# Altium PCB power_inductor_tester.PcbDoc
Units mm, origin at the board's own origin, x right, y up, seen from the top; angles counter-clockwise.
Board outline 95.6 x 69.5 mm, 2 copper layers (Top Layer, Bottom Layer); 37 components, 17 nets, 101 pads, 156 vias.
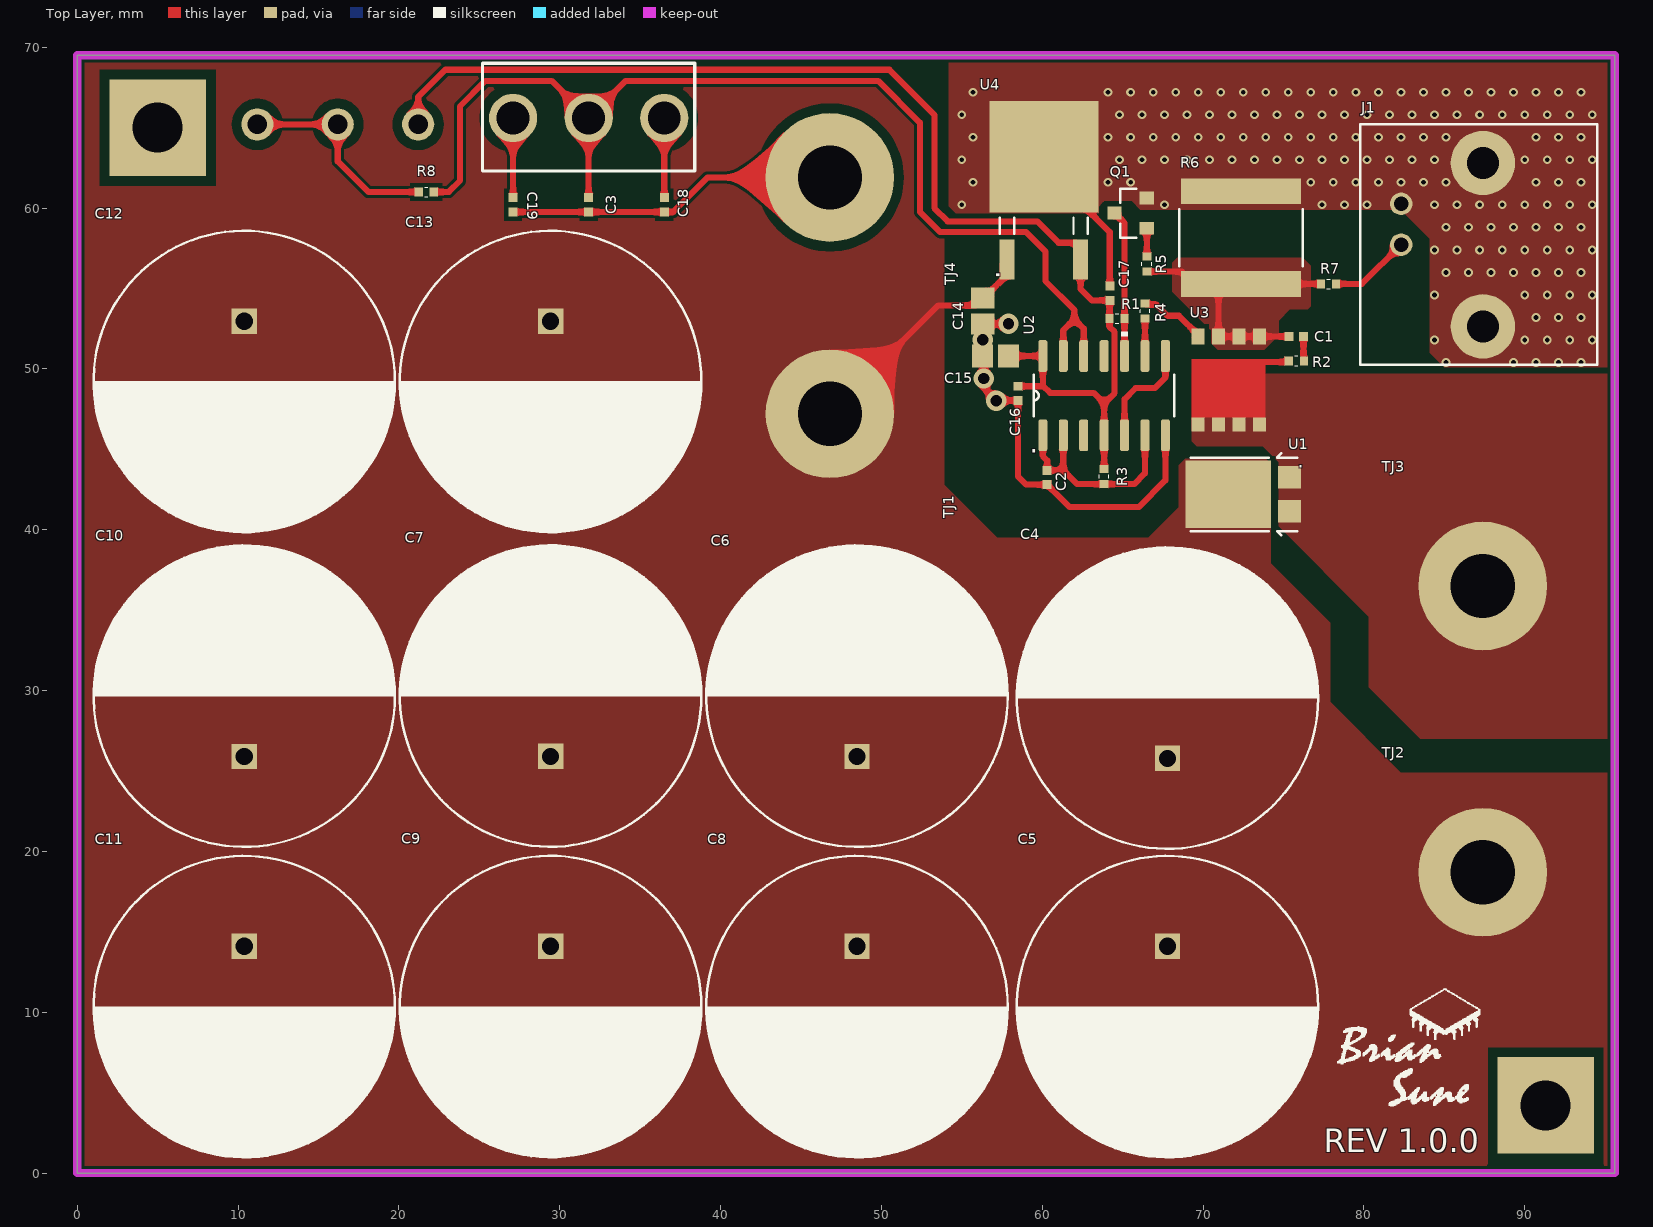
[diagram p0: Top Layer view]
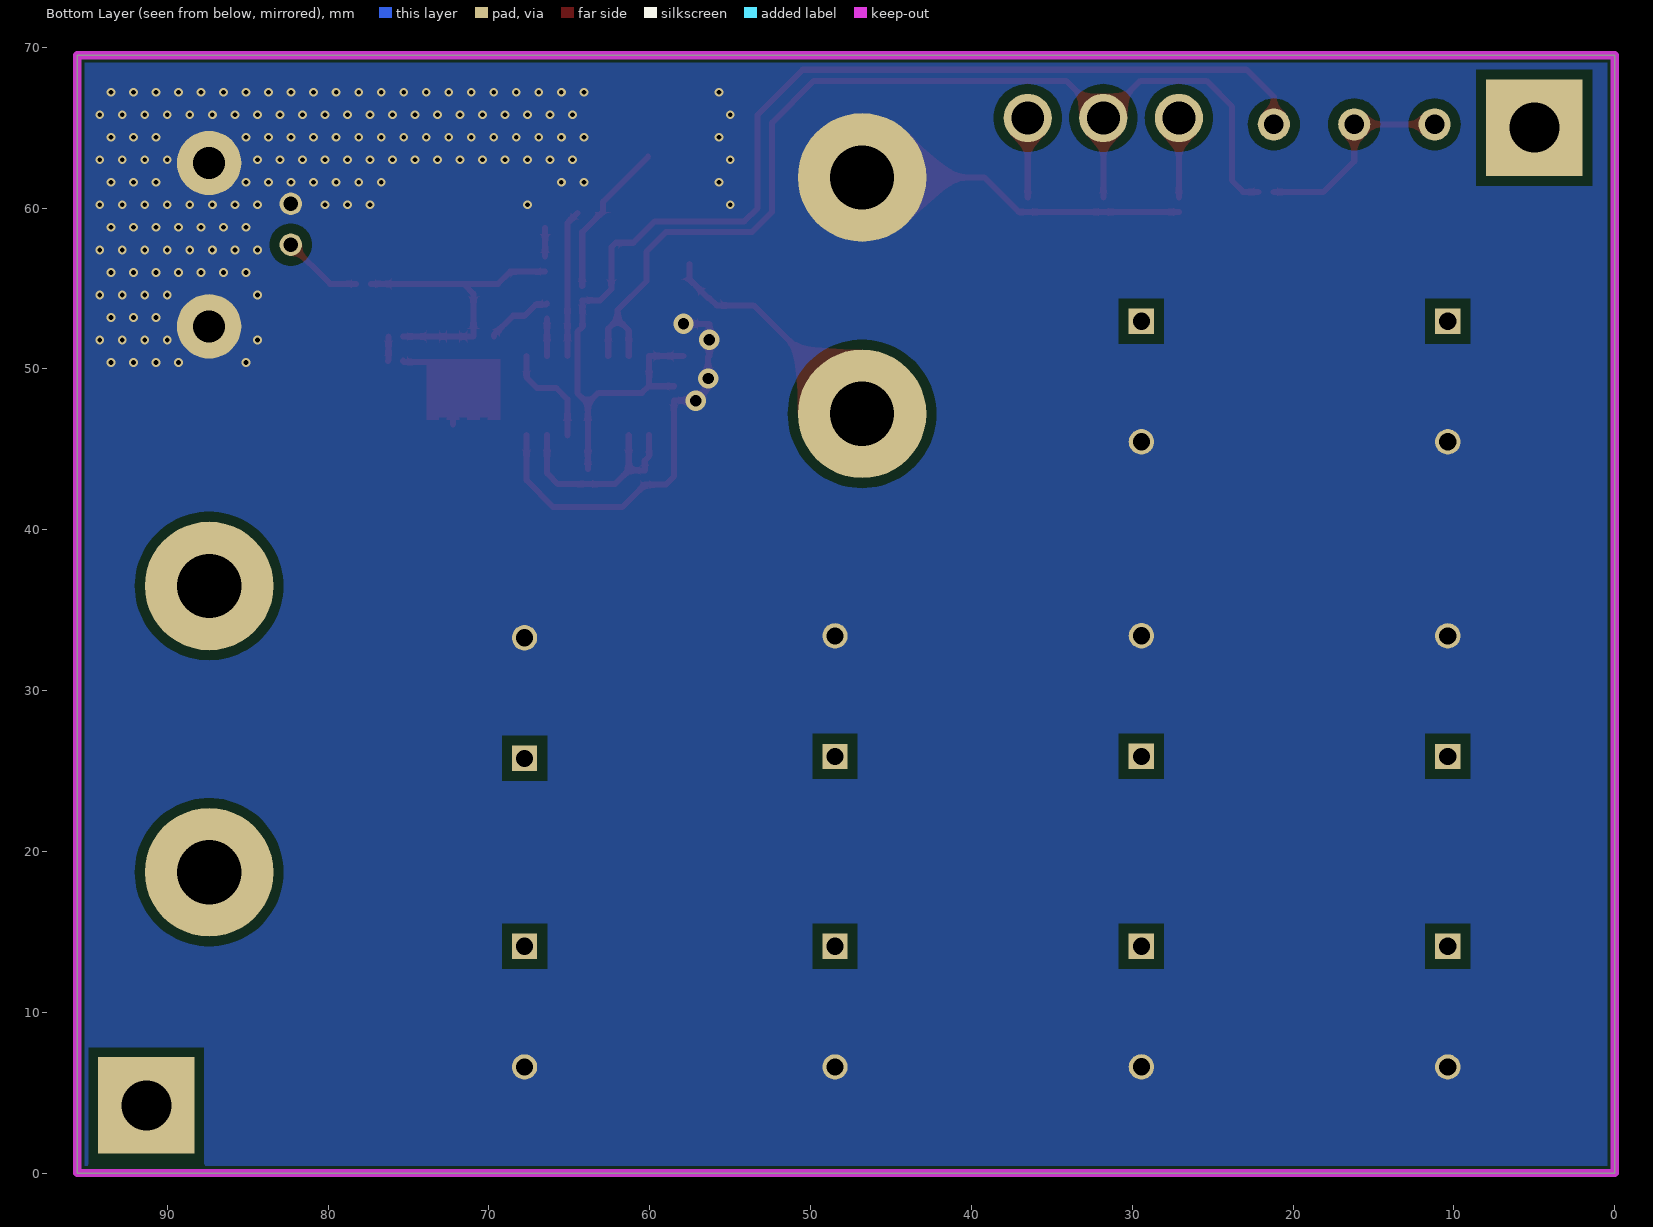
[diagram p1: Bottom Layer view, seen from below]
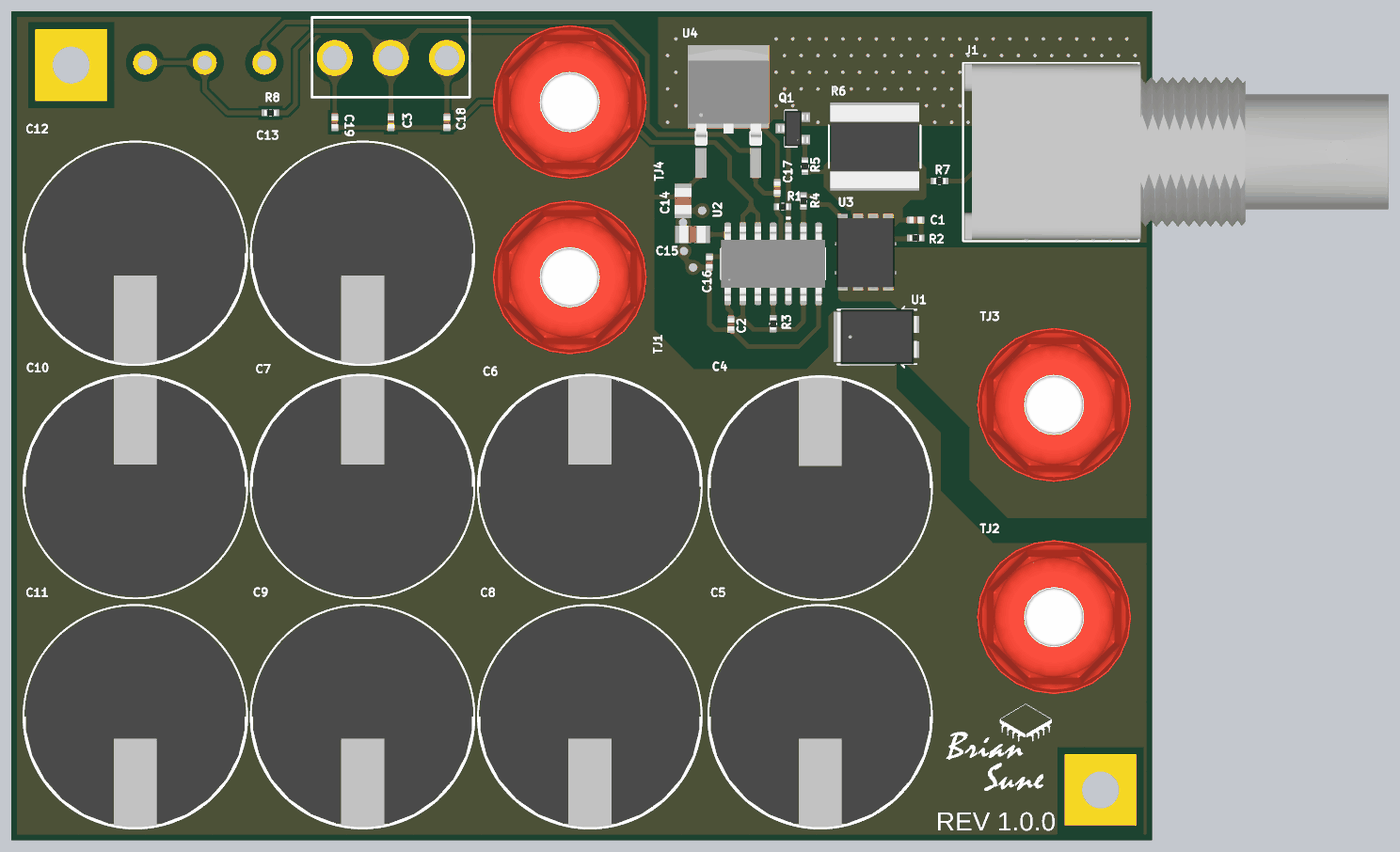
[diagram p2: 3D render of the assembled board from above, using the file's embedded part models]

## Layer stack, top to bottom
Top Solder: solder mask 0.0102, Solder Resist, Dk 3.5
Top Layer: signal copper 0.0356
Dielectric 1: dielectric 0.32, FR-4, Dk 4.8
Bottom Layer: signal copper 0.0356
Bottom Solder: solder mask 0.0102, Solder Resist, Dk 3.5

## Board outline
0,0 95.6,0 95.6,69.5 0,69.5

## Design rules (kind name [scope] priority, off if disabled: settings)
Clearance [All] p1: gap=0.152 ignorepadtopadclearanceinfootprint=FALSE except(0: Arc-Hole Track-Hole SMDPad-Hole THPad-Hole Via-Hole Fill-Hole Poly-Hole Region-Hole Text-Hole; 0.203: Track-Poly SMDPad-Region THPad-Region Poly-Region; 0.305: SMDPad-Poly; 0.406: Poly-Poly; 0.61: THPad-Poly)
DiffPairsRouting [All] p1: maxlimit=0.254 minlimit=0.152 mostfreqgap=0.203 toplayer_minwidth=0.152 toplayer_maxwidth=0.381 toplayer_prefwidth=0.203 bottomlayer_minwidth=0.152 bottomlayer_maxwidth=0.381 bottomlayer_prefwidth=0.203 maxuncoupledlength=12.7
Height [All] p1: minheight=0 maxheight=40 prefheight=12.7
HoleSize [All] p1: absolutevalues=TRUE maxlimit=6 minlimit=0.025 maxpercent=80.000 minpercent=20.000
HoleToHoleClearance [All] p1: gap=0.076 allowstackedmicrovias=TRUE
MinimumSolderMaskSliver [All] p1: minsoldermaskwidth=0.025
PolygonConnect [All] p1: connectstyle=Direct reliefconductorwidth=0.305 reliefentries=4 polygonreliefangle="90 Angle" airgapwidth=0.203
RoutingVias [All] p1: holewidth=0.4 width=0.6 viastyle="Through Hole" minholewidth=0.3 minwidth=0.5 maxholewidth=2.8 maxwidth=3
SilkToSilkClearance [All] p1: silktosilkclearance=0.076
SilkToSolderMaskClearance [IsPad] p1: minsilkscreentomaskgap=0.025 clearancetoexposedcopper=TRUE
SolderMaskExpansion [All] p1: expansion=0.025
Width [All] p1: maxlimit=1.016 minlimit=0.152 preferedwidth=0.254
23 further rules are at their usual default settings.

## Components (designator, comment, footprint, x,y, rotation, side; value= is the part's Value field where it differs from the comment)
C1 "10uF" CAP_CC0402_YAG 75.8,52.012 r0 top
C2 "10uF" CAP_CC0402_YAG 60.31,43.246 r90 top
C3 "10uF" CAP_CC0402_YAG 31.8,60.2 r90 top
C4 "2200uF" CAP_2135_18X25_VIS 67.787,25.779 r90 top
C5 "2200uF" CAP_2135_18X25_VIS 67.787,14.095 r270 top
C6 "2200uF" CAP_2135_18X25_VIS 48.483,25.899 r90 top
C7 "2200uF" CAP_2135_18X25_VIS 29.433,25.906 r90 top
C8 "2200uF" CAP_2135_18X25_VIS 48.483,14.095 r270 top
C9 "2200uF" CAP_2135_18X25_VIS 29.433,14.102 r270 top
C10 "2200uF" CAP_2135_18X25_VIS 10.383,25.899 r90 top
C11 "2200uF" CAP_2135_18X25_VIS 10.383,14.095 r270 top
C12 "2200uF" CAP_2135_18X25_VIS 10.383,52.964 r270 top
C13 "2200uF" CAP_2135_18X25_VIS 29.433,52.964 r270 top
C14 "10uF" CAPC220145_145N_KEM 56.297,53.6 r90 top
C15 "10uF" CAPC220145_145N_KEM 57.1,50.798 r0 top
C16 "10uF" CAP_CC0402_YAG 58.5,48.474 r90 top
C17 "10uF" CAP_CC0402_YAG 64.2,54.7 r270 top
C18 "10uF" CAP_CC0402_YAG 36.5,60.2 r270 top
C19 "10uF" CAP_CC0402_YAG 27.1,60.2 r270 top
J1 "BNC JACK" conn2_1-1337543-0_TEC 82.32,57.72 r270 top
Q1 "MMSS8050-H-TP" TNPN_SOT-23_MCC 65.501,59.688 r90 top
R1 "10k" 0402_PAN 64.65,53.122 r180 top
R2 "220k" 0402_PAN 75.8,50.5 r0 top
R3 "220k" 0402_PAN 63.85,43.305 r90 top
R4 "220k" 0402_PAN 66.39,53.592 r90 top
R5 "100R" 0402_PAN 66.504,56.513 r90 top
R6 "R010" STA_CSSH2728_STP 72.359,58.164 r270 top
R7 "220k" 0402_PAN 77.8,55.281 r180 top
R8 "10k" 0402_PAN 21.7,61 r180 top
TJ1 "73098-0" 73098 46.8,47.2 r0 top
TJ2 "73098-0" 73098 87.4,18.7 r0 top
TJ3 "73098-0" 73098 87.4,36.5 r0 top
TJ4 "73098-0" 73098 46.8,61.9 r0 top
U1 "SB10100L" DIO_10100V_ONS 72.572,42.2 r90 top
U2 "NE556D" D14 63.85,48.334 r90 top
U3 "NMOS" SMT_009LCG-7_DIO 71.597,49.274 r270 top
U4 "MC78M12ABDTG" DPAK-3_ONS 60.1,63.2 r0 top

## Footprints (in the part's own frame and the unit in brackets; to place one, negate y for a bottom-side part, rotate by r counter-clockwise, add the part's x,y. Pads: shape width x height; smd on the part's side, far side on the other; paste and mask are expansions set on the pad)
0402_PAN [mil]
  rect 20x22 smd paste+0 mask+0: 1(-18.5,0) 2(18.5,0)
  silkscreen extent -4,-12 4,12, body extent -20,-10 20,10, height 14
73098 [mm]
  round 8 hole 4: T1(0,0)
  body extent -6.45,-6.45 6.45,6.45, height 29.89
CAP_2135_18X25_VIS [mil]
  rect 62x62 hole 42: 1(0,0)
  round 62 hole 42: 2(295.28,0)
  silkscreen extent -221,-369 685,370, body extent -216,-364 513,364, height 1064
CAP_CC0402_YAG [mil]
  rect 22x22 smd: 1(-17.5,0) 2(17.5,0)
  body extent -21,-11 21,11, height 22
CAPC220145_145N_KEM [mm]
  rect 1.306x1.45 smd paste+0 mask+0: 1(-0.803,0) 2(0.803,0)
  body extent -1.1,-0.72 1.1,0.72, height 1.45
conn2_1-1337543-0_TEC [mil]
  round 55 hole 35: 1(0,0) 2(-100,0)
  round 157.48 hole 79: 3(-200,200) 4(200,200)
  silkscreen extent -294,-100 294,480, body extent -289,-94 289,1303, height 695
D14 [mil]
  rrect50% 78x22 smd: 1(-97,150) 2(-97,100) 3(-97,50) 4(-97,0) 5(-97,-50) 6(-97,-100) 7(-97,-150) 8(97,-150) 9(97,-100) 10(97,-50) 11(97,0) 12(97,50) 13(97,100) 14(97,150)
  silkscreen extent -51,-172 156,172, body extent -122,-172 122,172, height 69
DIO_10100V_ONS [mil]
  rect 55x57 smd paste+0 mask+0: 1(41.34,-110.5) 2(-41.34,-110.5)
  rect 165x208.66 smd paste+0 mask+0: 3(0,39.37)
  silkscreen extent -100,-130 100,131, body extent -91,-131 91,131, height 49
DPAK-3_ONS [mil]
  rect 37x98 smd: 1(-90.16,-252.5) 3(90.16,-252.5)
  rect 267x273 smd: 2(0,0)
  silkscreen extent -108,-190 108,-150, body extent -133,-195 133,123, height 67
SMT_009LCG-7_DIO [mm]
  rect 1x0.8 smd: 1(-2.738,1.905) 2(-2.738,0.635) 3(-2.738,-0.635) 4(-2.738,-1.905)
  rect 0.85x0.8 smd: 5(2.738,-1.905) 6(2.738,-0.635) 7(2.738,0.635) 8(2.738,1.905)
  Top Layer region: 2.454,2.3 2.2,2.3 2.2,1.5 2.454,1.5
  Top Layer region: -1.338,-2.3 2.312,-2.3 2.312,2.3 -1.338,2.3
  Top Layer region: 2.2,0.235 2.454,0.235 2.454,1.035 2.2,1.035
  Top Layer region: 2.2,-1.035 2.454,-1.035 2.454,-0.235 2.2,-0.235
  Top Layer region: 2.2,-2.3 2.454,-2.3 2.454,-1.5 2.2,-1.5
  Top Layer region: -0.564,-1.166 -0.564,-1.166 -0.564,-1.166 -0.564,-1.166 -0.564,-1.166 -0.564,-1.166 -0.564,-1.166 -0.564,-1.166
  Top Layer region: -0.564,1.166 -0.564,1.166 -0.564,1.166 -0.564,1.166 -0.564,1.166 -0.564,1.166 -0.564,1.166 -0.564,1.166
  body extent -3.07,-2.57 3.08,2.58, height 1
STA_CSSH2728_STP [mil]
  rect 63x293 smd paste+0 mask+0: 1(-113.5,0) 2(113.5,0)
  silkscreen extent -70,-152 70,152, body extent -137,-146 137,146, height 49
TNPN_SOT-23_MCC [mil]
  rect 31x35 smd paste+0 mask+0: 1(-37,-39.5) 2(37,-39.5) 3(0,39.5)
  silkscreen extent -60,-13 60,25, body extent -59,-50 59,48, height 43

## Part data
C1 C2 C3 C16 C17 C18 C19: library part C0402C106M9PAC7411, "C0402C106M9PAC7411 / Multilayer Ceramic Capacitors MLCC - SMD/SMT 6.3V 10uF X5R 0402 20%", Mfr.=KEMET, ComponentLink1Description=mouser, ComponentLink1URL=https://www.mouser.hk/ProductDetail/KEMET/C0402C106M9PAC7411?qs=sGAEpiMZZMsh%252B1woXyUXj6I3P2ah4Lb%252BTMRMxmSxmgo%3D, Mfr. No=C0402C106M9PAC7411
C4 C5 C6 C7 C8 C9 C10 C11 C12 C13: library part MAL214650222E3, Mfr_Name=Vishay, Copyright="Copyright (C) 2022 Ultra Librarian. All rights reserved.", Manufacturer_Part_Number=MAL214650222E3, RefDes=RefDes, Type=DEV
C14 C15: library part C0805C106M9RACTU, "No Description Available", Mfr_Name=Kemet, Copyright="Copyright (C) 2022 Ultra Librarian. All rights reserved.", Manufacturer_Part_Number=C0805C106M9RACTU, RefDes=RefDes, Type=DEV
J1: library part 1-1337543-0, "1-1337543-0", Mfr_Name="TE Connectivity", ComponentLink1Description=mouser, ComponentLink1URL=https://www.mouser.hk/ProductDetail/TE-Connectivity/5226990-1?qs=6LdcgtkSXnZEvS11ySUywA%3D%3D, Manufacturer_Part_Number=1-1337543-0
Q1: "No Description Available", Mfr_Name=MCC, Copyright="Copyright (C) 2021 Ultra Librarian. All rights reserved.", Manufacturer_Part_Number=MMSS8050-H-TP, RefDes=RefDes, Type=DEV
R1 R8: library part RT0402FRE0710KL, "RT0402FRE0710KL / SMD 1/16W 10K ohm 1% 50ppm", Mfr.=YAGEO, ComponentLink1Description=mouser, ComponentLink1URL=https://www.mouser.hk/ProductDetail/YAGEO/RT0402FRE0710KL?qs=BXCcY9r%252B08Amup7nMFKW1g%3D%3D, Mfr. No=RT0402FRE0710KL
R2 R3 R4 R7: library part RT0402FRE07220KL, "RT0402FRE07220KL / Thin Film Resistors - SMD 220K ohm 1% 50ppm High Stability", Mfr.=YAGEO, ComponentLink1Description=mouser, ComponentLink1URL=https://www.mouser.hk/ProductDetail/YAGEO/RT0402FRE07220KL?qs=gY0y7AQI9SMoL0bNFq1hfg%3D%3D, Mfr. No=RT0402FRE07220KL
R5: library part RT0402FRE07100RL, "RT0402FRE07100RL / Thin Film Resistors - SMD 1/16W 100 ohm 1% 50ppm", Mfr.=YAGEO, ComponentLink1Description=mouser, ComponentLink1URL=https://www.mouser.hk/ProductDetail/YAGEO/RT0402FRE07100RL?qs=BXCcY9r%252B08AcvLZjF7vcwQ%3D%3D, Mfr. No=RT0402FRE07100RL
R6: library part CSSH2728FT10L0, "CSSH2728FT10L0", Manufacturer_Part_Number=CSSH2728FT30L0, Mfr_Name="Stackpole International"
TJ1 TJ2 TJ3 TJ4: Manufacturer="Pomona Electronics", Manufacturer Product Number=73098-0, Supplier=Description
U1: "SCHOTTKY DIODE TO-277 100V 10A", Mfr_Name=MDD, ComponentLink1Description=digikey, ComponentLink1URL=https://www.digikey.hk/en/products/detail/nextgen-components/SB10100L/15929898?s=N4IgTCBcDaIMoCECMAGVKAyACEBdAvkA, Manufacturer_Part_Number=SB10100L, RefDes=RefDes, Type=DEV
U2: "No Description Available", Mfr_Name="Texas Instruments", Copyright="Copyright (C) 2022 Ultra Librarian. All rights reserved.", Manufacturer_Part_Number=NE556D, RefDes=RefDes, Type=DEV
U3: library part DMT10H009LCG-7, "DMT10H009LCG-7", Mfr_Name="Diodes Inc", Copyright="Copyright (C) 2022 Ultra Librarian. All rights reserved.", Manufacturer_Part_Number=DMT10H009LCG-7, RefDes=RefDes, Type=DEV
U4: "No Description Available", Mfr_Name=onsemi, Copyright="Copyright (C) 2022 Ultra Librarian. All rights reserved.", Manufacturer_Part_Number=MC78M12ABDTG, RefDes=RefDes, Type=DEV

## Free pads (board coordinates)
  rect 6x6 hole 3.1 paste+0 mask+0.001: ""(5,65) ""(91.3,4.2)
  round 2 hole 1.205 paste+0 mask+0.001: ""(11.2,65.2) ""(16.2,65.2) ""(21.2,65.2)
  round 3 hole 2.05 paste+0 mask+0.001: ""(27.1,65.6) ""(31.8,65.6) ""(36.5,65.6)

## Via types
v1: diameter 0.55, hole 0.3, Top Layer to Bottom Layer, tented both sides, 152 vias
v2: diameter 1.27, hole 0.711, Top Layer to Bottom Layer, tented both sides, 4 vias

## Nets (pads, with @x,y where several pads share a name; then routed paths per layer and width w, separated by ;. In a path a pad name is that pad's centre, name@x,y a point inside that pad or via, vN(x,y) a via of type N, cw(c..) or ccw(c..) an arc to the next point about the centre after c; other vN are vias at no path point)
CP_S0: C18.1 pad.@36.5,65.6 | length 5
  Top Layer w0.381: C18.1 pad.@36.5,65.6
CP_S1: C19.1 pad.@27.1,65.6 | length 5
  Top Layer w0.381: C19.1 pad.@27.1,65.6
GND: C2.1 C3.1 C4.2 C5.2 C6.2 C7.2 C8.2 C9.2 C10.2 C11.2 C12.2 C13.2 C14.1 C15.1 C16.1 C17.1 C18.2 C19.2 J1.2 J1.3 J1.4 Q1.2 R6.1 TJ4.T1 U2.7 U4.2 | length 56.6
  Top Layer w0.381: C19.2 C3.1 C18.2 37.055,59.755 39.2,61.9 TJ4.T1 ; v2(57.903,52.797) C14.1 v2(56.297,51.798) C15.1 56.369,50.726 v2(56.369,49.4) 56.369,48.8 v2(57.14,48.029) C16.1 58.5,43.3 58.999,42.801 C2.1 61.711,41.4 66,41.4 67.66,43.06 U2.7 ; U4.2 62.9,60.4 62.9,59.8 64.2,58.5 C17.1
  other v1: 85.1,50.4 89.3,50.4 90.7,50.4 92.1,50.4 93.5,50.4 84.4,51.8 90,51.8 91.4,51.8 92.8,51.8 94.2,51.8 90.7,53.2 92.1,53.2 93.5,53.2 84.4,54.6 90,54.6 91.4,54.6 92.8,54.6 94.2,54.6 85.1,56 86.5,56 87.9,56 89.3,56 90.7,56 92.1,56 93.5,56 84.4,57.4 85.8,57.4 87.2,57.4 88.6,57.4 90,57.4 91.4,57.4 92.8,57.4 94.2,57.4 85.1,58.8 86.5,58.8 87.9,58.8 89.3,58.8 90.7,58.8 92.1,58.8 93.5,58.8 55,60.2 67.6,60.2 77.4,60.2 78.8,60.2 80.2,60.2 84.4,60.2 85.8,60.2 87.2,60.2 88.6,60.2 90,60.2 91.4,60.2 92.8,60.2 94.2,60.2 55.7,61.6 64.1,61.6 65.5,61.6 76.7,61.6 78.1,61.6 79.5,61.6 80.9,61.6 82.3,61.6 83.7,61.6 85.1,61.6 90.7,61.6 92.1,61.6 93.5,61.6 55,63 64.8,63 66.2,63 67.6,63 69,63 70.4,63 71.8,63 73.2,63 74.6,63 76,63 77.4,63 78.8,63 80.2,63 81.6,63 83,63 84.4,63 90,63 91.4,63 92.8,63 94.2,63 55.7,64.4 64.1,64.4 65.5,64.4 66.9,64.4 68.3,64.4 69.7,64.4 71.1,64.4 72.5,64.4 73.9,64.4 75.3,64.4 76.7,64.4 78.1,64.4 79.5,64.4 80.9,64.4 82.3,64.4 83.7,64.4 85.1,64.4 90.7,64.4 92.1,64.4 93.5,64.4 55,65.8 64.8,65.8 66.2,65.8 67.6,65.8 69,65.8 70.4,65.8 71.8,65.8 73.2,65.8 74.6,65.8 76,65.8 77.4,65.8 78.8,65.8 80.2,65.8 81.6,65.8 83,65.8 84.4,65.8 85.8,65.8 87.2,65.8 88.6,65.8 90,65.8 91.4,65.8 92.8,65.8 94.2,65.8 55.7,67.2 64.1,67.2 65.5,67.2 66.9,67.2 68.3,67.2 69.7,67.2 71.1,67.2 72.5,67.2 73.9,67.2 75.3,67.2 76.7,67.2 78.1,67.2 79.5,67.2 80.9,67.2 82.3,67.2 83.7,67.2 85.1,67.2 86.5,67.2 87.9,67.2 89.3,67.2 90.7,67.2 92.1,67.2 93.5,67.2
LDO_VOUT: C15.2 C16.2 C17.2 pad.@21.2,65.2 R1.2 R3.2 U2.4 U2.14 U4.3 | length 77
  Top Layer w0.381: pad.@21.2,65.2 21.2,66.91 22.89,68.6 50.494,68.6 53.3,65.794 53.3,60 54.129,59.171 59.69,59.171 61.021,57.841 62.111,57.841 62.39,57.561 U4.3 62.39,54.96 63.094,54.255 C17.2 64.19,54.246 64.19,53.132 R1.2 64.18,52.62 64.498,52.302 64.498,48.498 63.85,47.85 ; C15.2 U2.14 60.04,48.96 ; C16.2 59.998,48.918 60.04,48.96 ; R3.2 U2.4 63.85,47.85 ; 60.04,48.96 60.5,48.5 63.2,48.5 63.85,47.85
NetC1_1: C1.1 R5.1 R6.2 R7.2 U3.1 U3.2 U3.3 | length 19.1
  Top Layer w0.381: R5.1 68.676,56.043 69.438,55.281 R6.2@71.572,55.281 ; C1.1 U3.1 U3.2 U3.3 70.962,54.672 R6.2@71.572,55.281 ; R7.2 R6.2 R6.2@71.572,55.281
NetC1_2: C1.2 R2.2 | length 1.5
  Top Layer w0.381: C1.2 76.245,50.525 R2.2
NetC2_2: C2.2 R3.1 U2.1 U2.2 U2.6 | length 13.6
  Top Layer w0.381: U2.1 60.04,44.57 60.31,44.3 C2.2 61.31,43.69 ; U2.2 61.31,43.69 ; U2.6 66.39,43.5 65.725,42.835 R3.1 62.165,42.835 61.31,43.69
NetC4_1: C4.1 C5.1 C6.1 C7.1 C8.1 C9.1 C10.1 C11.1 C12.1 C13.1 C14.2 TJ1.T1 TJ2.T1 U1.3 U4.1 | length 15.1
  Top Layer w0.381: TJ1.T1 53.54,53.94 55.835,53.94 C14.2 56.369,54.403 57.531,55.564 U4.1@57.531,56.507
NetJ1_1: J1.1 R7.1 | length 5.1
  Top Layer w0.381: R7.1 79.881,55.281 J1.1
NetQ1_1: Q1.1 R5.2 | length 1.8
  Top Layer w0.381: R5.2 Q1.1
NetQ1_3: Q1.3 R1.1 U2.10 | length 9.1
  Top Layer w0.381: Q1.3 65.12,59.066 R1.1 U2.10
NetR2_1: R2.1 TJ3.T1 U1.1 U1.2 U3.5 U3.6 U3.7 U3.8 | length 6.8
  Top Layer w0.381: U3.7 72.232,47.84 71.572,48.5 73.493,50.421 75.267,50.421 75.33,50.485 R2.1
NetR4_1: R4.1 U2.9 | length 2.3
  Top Layer w0.381: U2.9 R4.1
NetR4_2: R4.2 U3.4 | length 4.2
  Top Layer w0.381: R4.2 66.453,53.998 67.089,53.998 67.787,53.3 68.504,53.3 69.692,52.112 U3.4
NetU2_5: U2.5 U2.8 | length 6.7
  Top Layer w0.381: U2.5 65.12,48.12 65.8,48.8 67,48.8 67.66,49.46 U2.8
RC_CAP: C3.2 pad.@31.8,65.6 R8.1 U2.12 U2.13 | length 68.1
  Top Layer w0.381: R8.1 23.1,61 23.8,61.7 23.8,66.318 25.382,67.9 29.5,67.9 pad.@31.8,65.6 ; C3.2 pad.@31.8,65.6 ; U2.13 61.31,52.393 62,53.083 ; U2.12 62.58,52.503 62,53.083 ; pad.@31.8,65.6 34.1,67.9 49.8,67.9 52.4,65.3 52.4,59.759 53.659,58.5 59,58.5 60.2,57.3 60.2,55.463 62,53.663 62,53.083
RC_RES: pad.@11.2,65.2 pad.@16.2,65.2 R8.2 | length 13.1
  Top Layer w0.381: pad.@11.2,65.2 16.2,65.2 16.2,62.9 18.1,61 R8.2
pads on no net: U2.3 U2.11

## Polygon pours and split planes (outlines as drawn)
NetC4_1 on Top Layer "NETC4_1_L01_P002" (solid, remove dead copper, pour order 2): 95.6,0 95.6,24.9 82.3,24.9 77.9,29.3 77.9,34.203 74.203,37.9 74.203,44.097 73.9,44.4 68.903,44.4 68.504,44 68.504,41.404 66.6,39.5 57.201,39.5 53.9,42.801 53.9,69.5 0,69.5 0,0
GND on Top Layer "GND_L01_P008" (solid, remove dead copper, pour order 8): 82.3,59.9 84.1,58.1 84.1,51 85,50.1 95.6,50.1 95.6,69.5 54.2,69.5 54.2,60.1 54.612,59.688 63.5,59.688 63.5,60.072 63.865,60.437 65.563,60.437 66.1,59.9
no net on Top Layer "Top Layer-No Net" (solid, pour order 6): 68.676,59.6
NetC1_1 on Top Layer "NETC1_1_L01_P004" (solid, remove dead copper, pour order 4): 68.1,56.6 68.1,54.8 70.5,52.4 70.5,51.6 70.9,51.2 73.8,51.2 74.7,52.1 74.7,53 75.4,53.7 76.5,53.7 76.7,53.9 76.7,56.4 76.2,56.9 68.4,56.9
NetR2_1 on Top Layer "NETR2_1_L01_P000" (solid, remove dead copper, pour order 0): 69.3,49.7 95.6,49.7 95.6,27 83.5,27 80.3,30.2 80.3,34.6 74.7,40.2 74.7,44.207 73.707,45.2 69.6,45.2 69.3,45.5
GND on Bottom Layer "GND_L02_P010" (solid, remove dead copper, pour order 10): 53.9,69.5 95.6,69.5 95.6,0 0,0 0,69.5

## Keep-outs
Keep-Out Layer:
  the board outline again, w0.508

## Silkscreen, mask and mechanical layers (free items; w line width, h text height)
Top Overlay:
  drawing of 15 lines, arcs and shapes, not listed
  text "REV 1.0.0" at 77.5,0.8 h2.5